# Altium PCB PMU.PcbDoc
Units mm, origin at the board's own origin, x right, y up, seen from the top; angles counter-clockwise.
Board outline 59.65 x 38.4 mm, 2 copper layers (Top Layer, Bottom Layer); 52 components, 40 nets, 142 pads, 4 vias.
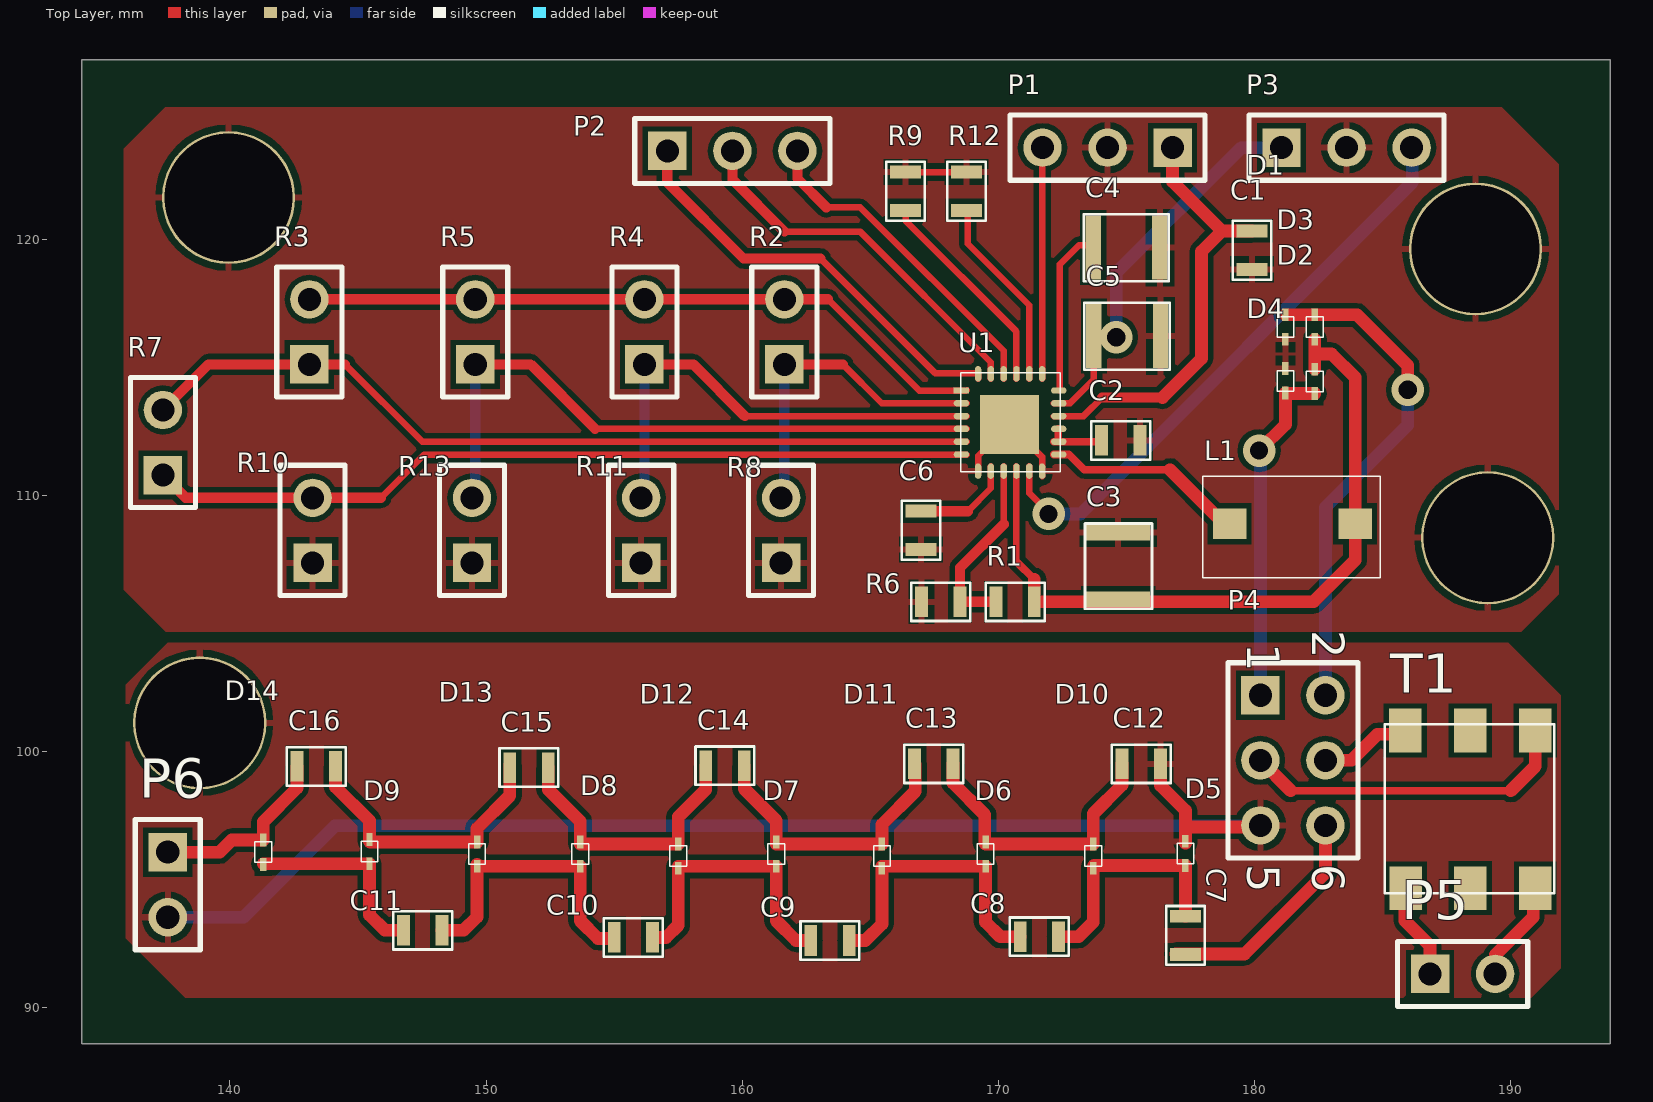
[diagram p0: Top Layer view]
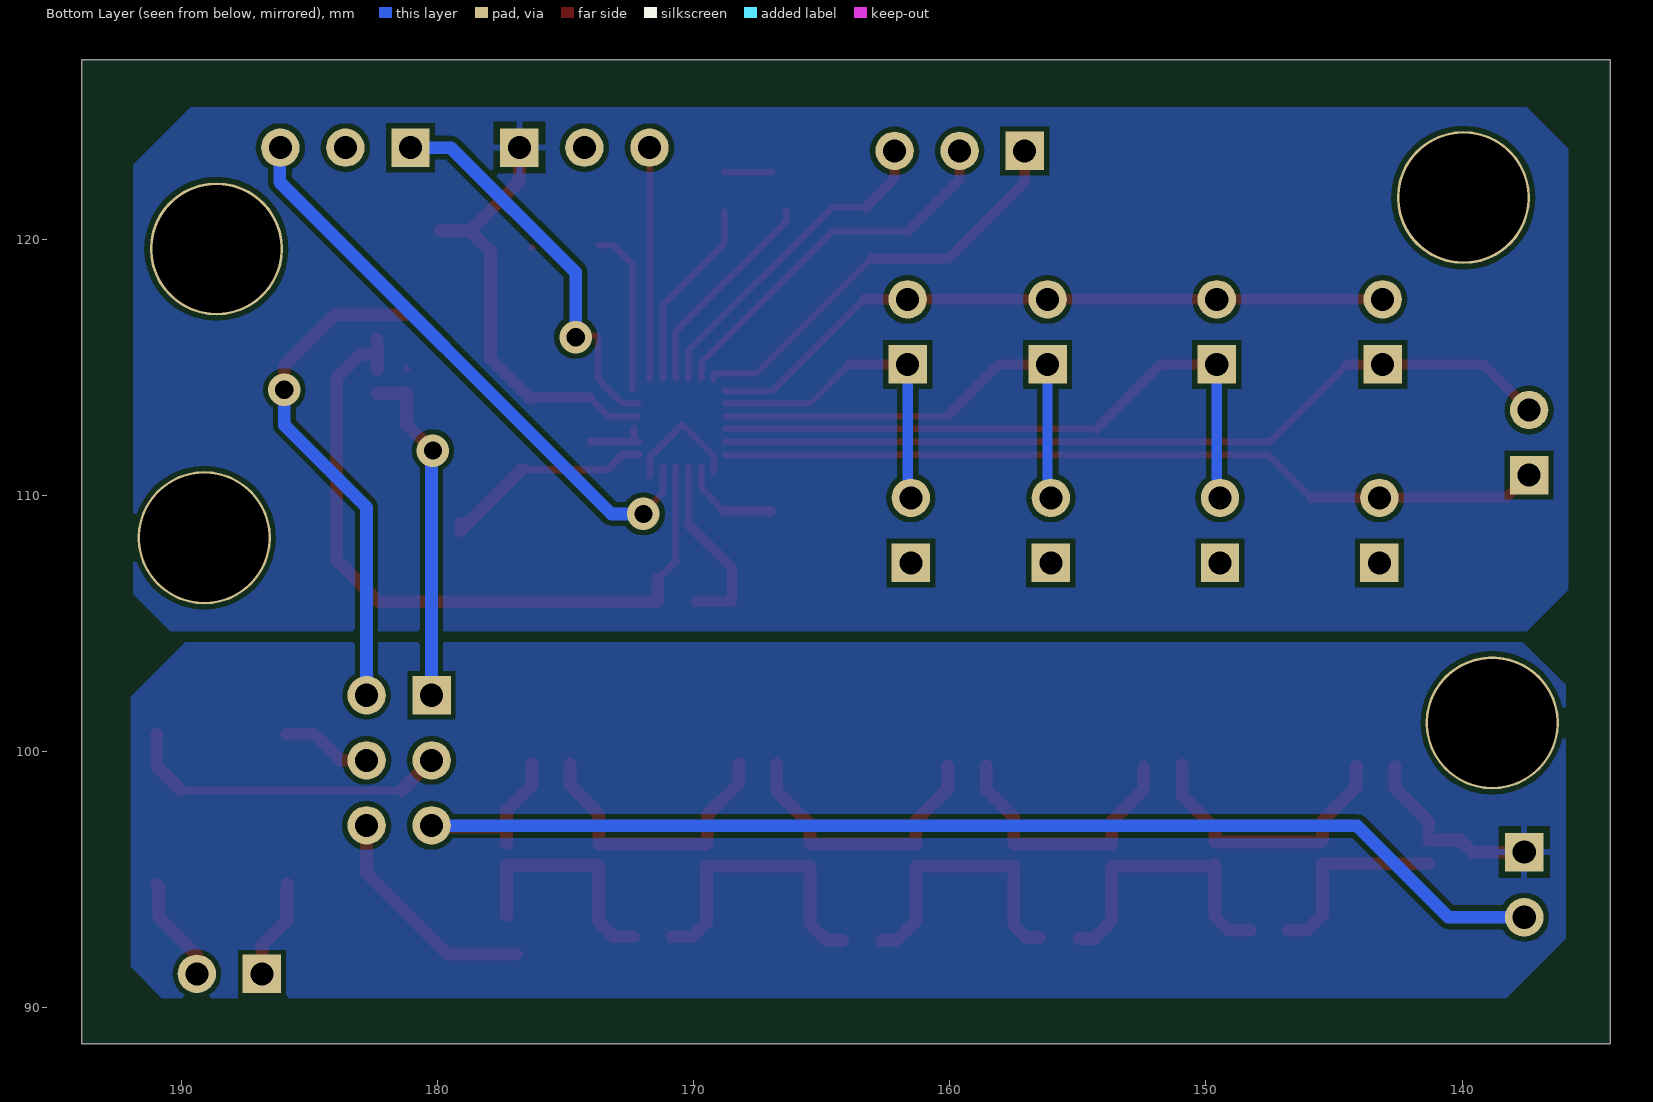
[diagram p1: Bottom Layer view, seen from below]

## Layer stack, top to bottom
Top Solder: solder mask 0.0102, Solder Resist, Dk 3.5
Top Layer: signal copper 0.0356
Dielectric 1: dielectric 0.32, FR-4, Dk 4.8
Bottom Layer: signal copper 0.0356
Bottom Solder: solder mask 0.0102, Solder Resist, Dk 3.5

## Board outline
134.225,88.6 193.875,88.6 193.875,127 134.225,127

## Design rules (kind name [scope] priority, off if disabled: settings)
Clearance 0 [All] p1: gap=0.2 except(0.127: Arc-Arc SMDPad-Text Arc-Track Arc-SMDPad Fill-Text Via-Via Track-SMDPad Track-Track Arc-THPad Via-Text Track-THPad SMDPad-SMDPad Poly-Text Track-Text Text-Text Arc-Text THPad-THPad Region-Text THPad-Text SMDPad-THPad)
PolygonConnect [All] p1: connectstyle=Relief reliefconductorwidth=0.254 reliefentries=4 polygonreliefangle="90 Angle" airgapwidth=0.254
RoutingVias [All] p1: holewidth=0.711 width=1.27 viastyle="Through Hole" minholewidth=0.711 minwidth=1.27 maxholewidth=0.711 maxwidth=1.27
SolderMaskExpansion [All] p1: expansion=0.102
UnpouredPolygon [All] p1: allowunpoured=FALSE
Width [All] p1: maxlimit=0.5 minlimit=0.254 preferedwidth=0.254
29 further rules are at their usual default settings.

## Components (designator, comment, footprint, x,y, rotation, side; value= is the part's Value field where it differs from the comment)
C1 "Cap" 0805 179.9,119.575 r90 top
C2 "Cap" 0805 174.775,112.15 r180 top
C3 "Cap" 1210 174.675,108.55 r270 top
C4 "Cap" 1210 176.3,119.675 r180 top
C5 "SuperCap" 1210 176.325,116.225 r180 top
C6 "Cap" 0805 166.977,108.637 r90 top
C7 "Cap" 0805 177.3,92.825 r270 top
C8 "Cap" 0805 171.6,92.775 r0 top
C9 "Cap" 0805 163.425,92.625 r0 top
C10 "Cap" 0805 155.75,92.75 r0 top
C11 "Cap" 0805 147.525,93.025 r0 top
C12 "Cap" 0805 175.575,99.525 r0 top
C13 "Cap" 0805 167.475,99.525 r0 top
C14 "Cap" 0805 159.325,99.45 r0 top
C15 "Cap" 0805 151.675,99.375 r0 top
C16 "Cap" 0805 143.375,99.425 r0 top
D1 "D Schottky" Diode2 181.2,116.175 r90 top
D2 "D Schottky" Diode2 182.35,116.975 r270 top
D3 "D Schottky" Diode2 182.35,114.05 r90 top
D4 "D Schottky" Diode2 181.2,114.875 r270 top
D5 "D Schottky" Diode2 177.3,96.425 r270 top
D6 "D Schottky" Diode2 169.5,96.4 r270 top
D7 "D Schottky" Diode2 161.325,96.4 r270 top
D8 "D Schottky" Diode2 153.675,96.4 r270 top
D9 "D Schottky" Diode2 145.45,96.5 r270 top
D10 "D Schottky" Diode2 173.7,95.525 r90 top
D11 "D Schottky" Diode2 165.45,95.525 r90 top
D12 "D Schottky" Diode2 157.5,95.525 r90 top
D13 "D Schottky" Diode2 149.65,95.6 r90 top
D14 "D Schottky" Diode2 141.3,95.675 r90 top
L1 "Inductor" Inductor_0 181.475,108.9 r180 top
P1 "Header 3" HDR1X3 176.8,123.575 r180 top
P2 "Header 3" HDR1X3 157.075,123.45 r0 top
P3 "Header 3" HDR1X3 181.05,123.575 r0 top
P4 "Header 3X2" HDR2X3 180.225,102.2 r270 top
P5 "Header 2" HDR1X2 186.85,91.325 r0 top
P6 "Header 2" HDR1X2 137.575,96.075 r270 top
R1 "Res1" 0805 170.65,105.85 r0 top
R2 "Res1" HDR1X2 161.643,115.114 r90 top
R3 "Res1" HDR1X2 143.101,115.114 r90 top
R4 "Res1" HDR1X2 156.182,115.114 r90 top
R5 "Res1" HDR1X2 149.578,115.114 r90 top
R6 "Res1" 0805 167.75,105.85 r0 top
R7 "Res1" HDR1X2 137.386,110.796 r90 top
R8 "Res1" HDR1X2 161.516,107.367 r90 top
R9 "Res1" 0805 166.375,121.875 r270 top
R10 "Res1" HDR1X2 143.228,107.367 r90 top
R11 "Res1" HDR1X2 156.055,107.367 r90 top
R12 "Res1" 0805 168.75,121.875 r270 top
R13 "Res1" HDR1X2 149.451,107.367 r90 top
T1 "Transformer" Transformer1 185.875,94.825 r90 top
U1 "ADP5092" LFCSP24 168.755,114.098 r0 top

## Footprints (in the part's own frame and the unit in brackets; to place one, negate y for a bottom-side part, rotate by r counter-clockwise, add the part's x,y. Pads: shape width x height; smd on the part's side, far side on the other; paste and mask are expansions set on the pad)
0805 [mm]
  rect 0.5x1.2 smd: 1(-0.75,0) 2(0.75,0)
  silkscreen extent -1.15,-0.75 1.15,0.75
1210 [mm]
  rect 0.6x2.5 smd: 1(0,0) 2(2.6,0)
  silkscreen extent -0.36,-1.3 2.97,1.32
Diode2 [mm]
  rect 0.5x0.25 smd mask+0.05: 1(-0.075,0) 2(0.875,0)
  silkscreen extent 0,-0.32 0.8,0.33
HDR1X2 [mm] "Connector; Header; 2 Position"
  rect 1.5x1.5 hole 0.9: 1(0,0)
  round 1.5 hole 0.9: 2(2.54,0)
  silkscreen extent -1.27,-1.27 3.81,1.27
HDR1X3 [mm] "Connector; Header; 3 Position"
  rect 1.5x1.5 hole 0.9: 1(0,0)
  round 1.5 hole 0.9: 2(2.54,0) 3(5.08,0)
  silkscreen extent -1.27,-1.27 6.35,1.27
HDR2X3 [mm] "Connector; Header; 3x2 Position"
  rect 1.5x1.5 hole 0.9: 1(0,0)
  round 1.5 hole 0.9: 2(0,2.54) 3(2.54,0) 4(2.54,2.54) 5(5.08,0) 6(5.08,2.54)
  silkscreen extent -1.27,-1.27 6.35,3.81
Inductor_0 [mm] "WE"
  rect 1.3x1.2 smd: 1(-2.45,0) 2(2.45,0)
  silkscreen extent -3.43,-1.85 3.5,2.12
LFCSP24 [mm]
  rect 0.6x0.25 smd mask+0.05: 1(-0.2,0)
  oval 0.6x0.25 smd mask+0.05: 2(-0.2,-0.5) 3(-0.2,-1) 4(-0.2,-1.5) 5(-0.2,-2) 6(-0.2,-2.5) 13(3.6,-2.5) 14(3.6,-2) 15(3.6,-1.5) 16(3.6,-1) 17(3.6,-0.5) 18(3.6,0)
  oval 0.25x0.6 smd mask+0.05: 7(0.45,-3.15) 8(0.95,-3.15) 9(1.45,-3.15) 10(1.95,-3.15) 11(2.45,-3.15) 12(2.95,-3.15) 19(2.95,0.65) 20(2.45,0.65) 21(1.95,0.65) 22(1.45,0.65) 23(0.95,0.65) 24(0.45,0.65)
  rect 2.3x2.3 smd mask+0.05: 25(1.675,-1.325)
  silkscreen extent -0.23,-3.17 3.66,0.69
Transformer1 [mm]
  rect 1.7x1.27 smd: 1(-0.15,-0.025) 2(-0.15,-2.54) 3(-0.15,-5.08) 4(6,-5.08) 5(6,-2.54) 6(6,0)
  silkscreen extent -0.35,-5.82 6.25,0.8

## Part data
C1 C2 C3 C4 C6 C7 C8 C9 C10 C11 C12 C13 C14 C15 C16: "Capacitor"
C5: library part Cap, "Super Capacitor"
D1 D2 D3 D4 D5 D6 D7 D8 D9 D10 D11 D12 D13 D14: "Schottky Diode"
P1 P2 P3: "Header, 3-Pin"
P4: "Header, 3-Pin, Dual row"
P5 P6: "Header, 2-Pin"
R1 R2 R3 R4 R5 R6 R7 R8 R9 R10 R11 R12 R13: "Resistor"

## Free pads (board coordinates)
  round 5.2 hole 5 mask+0: Shield1(139.95,121.625) Shield1(188.625,119.625) Shield1(189.1,108.35) Shield2(138.825,101.125)

## Via types
v1: diameter 1.27, hole 0.711, Top Layer to Bottom Layer, 4 vias

## Nets (pads, with @x,y where several pads share a name; then routed paths per layer and width w, separated by ;. In a path a pad name is that pad's centre, name@x,y a point inside that pad or via, vN(x,y) a via of type N, cw(c..) or ccw(c..) an arc to the next point about the centre after c; other vN are vias at no path point)
BACKUP: C4.2 U1.18 | length 6.5
  Top Layer w0.254: U1.18@172.4,114.098 172.4,119.025 173.15,119.775 C4.2@173.7,119.775
BAT: C5.2 P3.1 U1.17 | length 15.4
  Top Layer w0.254: U1.17@172.155,113.598 172.798,113.598 173.725,114.525 C5.2@173.725,116.075 ; C5.2 v1@174.6,116.225
  Bottom Layer w0.5: v1(174.6,116.175) 174.6,118.7 179.475,123.575 P3.1
GND: C1.1 C2.1 C3.1 C4.1 C5.1 C6.1 D1.1 D4.1 P1.2 P3.2 pad.Shield1 R6.1 R8.1 R9.1 R10.1 R11.1 R12.1 R13.1 U1.7 U1.12 U1.25 | length 7.4
  Top Layer w0.254: R9.1@166.9,122.625 R12.1@168.8,122.625 ; U1.7@169.209,110.9 169.209,111.552 U1.25 171.701,111.502 171.701,111.152 171.705,111.148 U1.12@171.705,110.745 ; P1.2 P1.2@174.325,123.575 ; C4.1 C4.1@176.325,119.65 ; P3.2@183.59,123.065 P3.2
GND2: C12.2 D5.1 P4.5 P6.2 pad.Shield2 | length 50.8
  Top Layer w0.5: C12.2 176.325,98.675 177.3,97.7 D5.1@177.3,96.425 ; 177.3,97.062 180.282,97.062 P4.5
  Bottom Layer w0.5: P6.2 140.535,93.535 144.105,97.105 P4.5@180.365,97.105
NetC2_2: C2.2 U1.14 U1.15 | length 2.4
  Top Layer w0.3: U1.14@172.155,112.098 C2.2@174.023,112.098 ; U1.14@172.33,112.098 U1.15@172.33,112.598
NetC6_2: C6.2 U1.8 | length 4
  Top Layer w0.254: 168.812,109.387 169.705,110.28 U1.8@169.705,111.148
  Top Layer w0.4: C6.2 168.812,109.387
NetC7_1: C7.1 C8.2 D5.2 D10.1 | length 9.4
  Top Layer w0.254: D10.1@173.7,95.525 D10.1@173.725,95.55 ; C7.1@177.275,93.55 C7.1
  Top Layer w0.5: C8.2 173.125,92.775 173.7,93.35 D10.1@173.7,95.525 ; D10.1@173.725,95.55 D5.2 C7.1
NetC8_1: C8.1 C9.2 D6.2 D11.1 | length 11.6
  Top Layer w0.5: C9.2 164.8,92.625 165.45,93.275 165.45,95.525 D6.2 169.5,93.35 170.075,92.775 C8.1
NetC9_1: C9.1 C10.2 D7.2 D12.1 | length 11.1
  Top Layer w0.5: C10.2 157.025,92.75 157.5,93.225 157.5,95.525 D7.2 161.325,93.4 162.1,92.625 C9.1
NetC10_1: C10.1 C11.2 D8.2 D13.1 | length 11.4
  Top Layer w0.254: C10.1@154.95,92.7 C10.1
  Top Layer w0.5: C11.2 149.125,93.025 149.65,93.55 D13.1@149.65,95.6 ; D13.1 D8.2 153.675,93.4 154.375,92.7 C10.1@154.95,92.7
NetC11_1: C11.1 D9.2 D14.1 | length 7.7
  Top Layer w0.5: D14.1@141.3,95.625 D9.2 145.45,93.625 146.05,93.025 C11.1
NetC12_1: C12.1 C13.2 D6.1 D10.2 | length 11.4
  Top Layer w0.254: D6.1@169.462,96.437 D6.1@169.5,96.4
  Top Layer w0.5: C13.2 168.225,98.775 169.462,97.538 D6.1@169.462,96.437 ; D6.1@169.5,96.4 D10.2 173.7,97.575 174.825,98.7 C12.1
NetC13_1: C13.1 C14.2 D7.1 D11.2 | length 11.4
  Top Layer w0.254: C13.1 C13.1@166.75,99.5
  Top Layer w0.5: C14.2 160.075,98.55 161.325,97.3 161.325,96.4 D11.2 165.45,97.15 166.75,98.45 C13.1@166.75,99.5
NetC14_1: C14.1 C15.2 D8.1 D12.2 | length 10.8
  Top Layer w0.5: C15.2 152.425,98.525 153.675,97.275 153.675,96.4 D12.2 157.5,97.45 158.575,98.525 C14.1
NetC15_1: C15.1 C16.2 D9.1 D13.2 | length 11.2
  Top Layer w0.254: D9.1@145.45,96.5 D9.1@145.475,96.475
  Top Layer w0.5: C16.2 144.125,98.625 145.45,97.3 D9.1@145.45,96.5 ; D9.1@145.475,96.475 D13.2 149.65,97 150.925,98.275 C15.1@150.925,99.475
NetL1_2: L1.2 U1.13 | length 8.4
  Top Layer w0.3: U1.13@172.155,111.598 172.157,111.6 172.75,111.6 173.35,111 176.7,111
  Top Layer w0.5: 176.7,111 179.075,108.625 L1.2@179.075,108.9
NetP2_1: P2.1 U1.24 | length 16.7
  Top Layer w0.254: 163.05,119.25 167.525,114.775 169.205,114.775 U1.24@169.205,114.548
  Top Layer w0.4: P2.1 157.075,122.225 160.05,119.25 163.05,119.25
NetP2_2: P2.2 U1.23 | length 14.8
  Top Layer w0.254: 161.65,120.3 164.6,120.3 169.705,115.195 U1.23@169.705,114.548
  Top Layer w0.4: P2.2 159.615,122.335 161.65,120.3
NetP2_3: P2.3 U1.22 | length 13
  Top Layer w0.254: 163.275,121.25 164.6,121.25 170.205,115.645 U1.22@170.205,114.548
  Top Layer w0.4: P2.3 162.155,122.37 163.275,121.25
NetP5_1: P5.1 T1.1 | length 3.9
  Top Layer w0.5: T1.1@185.875,94.825 185.875,93.4 186.85,92.425 P5.1
NetP5_2: P5.2 T1.3 | length 4.1
  Top Layer w0.5: P5.2 189.39,92.065 190.875,93.55 190.875,94.745 T1.3@190.955,94.825
NetR1_1: R1.1 R6.2 U1.9 | length 7.4
  Top Layer w0.254: 170.205,108.88 U1.9@170.205,111.148
  Top Layer w0.4: R1.1 R6.2 168.5,107.175 170.205,108.88
NetR2_1: R2.1 R8.2 U1.2 | length 12.8
  Top Layer w0.254: 163.929,115.114 165.445,113.598 U1.2@168.755,113.598
  Top Layer w0.4: R2.1 163.929,115.114
  Bottom Layer w0.4: R8.2@161.643,110.034 R2.1
NetR3_1: R3.1 R7.2 U1.5 | length 33.4
  Top Layer w0.254: 144.498,115.114 147.514,112.098 U1.5@168.755,112.098
  Top Layer w0.4: R7.2 139.164,115.114 R3.1 144.498,115.114
NetR4_1: R4.1 R11.2 U1.3 | length 18.5
  Top Layer w0.254: 160.103,113.098 U1.3@168.755,113.098
  Top Layer w0.4: R4.1 158.087,115.114 160.103,113.098
  Bottom Layer w0.4: R11.2@156.182,110.034 R4.1
NetR5_1: R5.1 R13.2 U1.4 | length 25.3
  Top Layer w0.254: 154.253,112.598 U1.4@168.755,112.598
  Top Layer w0.4: R5.1 151.737,115.114 154.253,112.598
  Bottom Layer w0.4: R13.2@149.578,110.034 R5.1
NetR7_1: R7.1 R10.2 U1.6 | length 32.4
  Top Layer w0.254: 145.895,109.907 147.586,111.598 U1.6@168.755,111.598
  Top Layer w0.4: R7.1 138.275,109.907 R10.2 145.895,109.907
NetR9_2: R9.2 U1.21 | length 8.4
  Top Layer w0.254: R9.2 166.375,120.725 170.705,116.395 U1.21@170.705,114.548
NetR12_2: R12.2 U1.20 | length 7.5
  Top Layer w0.254: R12.2@168.8,121.1 168.8,119.825 171.205,117.42 U1.20@171.205,114.548
R\S\T\\: P1.3 U1.19 | length 9
  Top Layer w0.254: U1.19@171.705,114.548 P1.3@171.705,123.575
REF: R2.2 R3.2 R4.2 R5.2 U1.1 | length 27.1
  Top Layer w0.254: 163.346,117.654 166.906,114.094 168.751,114.094 U1.1@168.755,114.098
  Top Layer w0.4: R3.2 R5.2 R4.2 R2.2 163.346,117.654
REG_GOOD: P3.3 U1.11 | length 23.1
  Top Layer w0.254: U1.11@171.205,111.148 171.205,110.095 171.958,109.342 v1(171.958,109.28)
  Bottom Layer w0.254: P3.3 P3.3@186.15,123.555
  Bottom Layer w0.5: v1(171.958,109.28) 173.205,109.28 186.15,122.225 P3.3@186.15,123.555
VCC: C1.2 P1.1 U1.16 | length 17.2
  Top Layer w0.254: U1.16@172.155,113.098 173.323,113.098 174.05,113.825
  Top Layer w0.4: 174.05,113.825 176.4,113.825
  Top Layer w0.5: 176.4,113.825 177.925,115.35 177.925,119.525 178.725,120.325 ; P1.1 176.8,122.25 178.725,120.325 ; C1.2 178.725,120.325
VCC2: C16.1 D14.2 P6.1 | length 7.3
  Top Layer w0.5: P6.1 139.6,96.075 140.075,96.55 D14.2 141.3,97.25 142.625,98.575 C16.1
VIN: C3.2 D2.2 D3.2 L1.1 R1.2 U1.10 | length 29
  Top Layer w0.254: 170.705,107.42 U1.10@170.705,111.148
  Top Layer w0.3: 170.705,107.42 171.4,106.725
  Top Layer w0.5: 171.4,106.725 R1.2 182.3,105.85 183.925,107.475 L1.1 183.925,114.6 183,115.525 182.35,115.525 ; D3.2 D2.2
VIN1+: D1.2 D2.1 P4.2 | length 19.8
  Top Layer w0.5: D1.2 D2.1 184,117.05 185.975,115.075 v1(185.975,114.125)
  Bottom Layer w0.5: P4.2 182.765,109.54 185.975,112.75 v1(185.975,114.125)
VIN1-: D3.1 D4.2 P4.1 | length 13.4
  Top Layer w0.5: v1(180.175,111.75) 181.2,112.775 D4.2 181.225,113.975 D3.1
  Bottom Layer w0.5: v1(180.175,111.75) 180.225,111.7 P4.1
VIN2+: C7.2 P4.6 | length 9
  Top Layer w0.5: C7.2@176.925,92.1 179.6,92.1 182.765,95.265 P4.6
VIN+: P4.4 T1.6 | length 3.5
  Top Layer w0.5: P4.4 183.785,99.66 184.8,100.675 T1.6@185.875,100.675
VIN-: P4.3 T1.4 | length 12.9
  Top Layer w0.3: 181.41,98.475 190,98.475
  Top Layer w0.5: P4.3 181.41,98.475 ; 190,98.475 190.955,99.43 T1.4@190.955,100.675
pads on no net: T1.2 T1.5

## Polygon pours and split planes (outlines as drawn)
VCC on Bottom Layer "Bottom Layer" (solid, pour order 5): 191.875,122.9 189.628,125.147 137.472,125.147 135.862,123.537 135.862,106.313 137.475,104.7 190.425,104.7 191.875,106.15
VCC2 on Bottom Layer "Bottom Pour 2" (solid, pour order 8): 135.962,102.612 137.625,104.275 189.85,104.275 191.975,102.15 191.975,91.6 190.75,90.375 138.275,90.375 135.962,92.688
GND on Top Layer "Top Pour" (solid, pour order 7): 135.862,123.537 137.472,125.147 189.653,125.147 191.875,122.925 191.875,106.15 190.4,104.675 137.5,104.675 135.862,106.313
GND2 on Top Layer "Top Pour 2" (solid, pour order 6): 135.937,102.612 137.575,104.25 189.9,104.25 191.95,102.2 191.95,91.55 190.8,90.4 138.25,90.4 135.937,92.713

## Silkscreen, mask and mechanical layers (free items; w line width, h text height)
Mechanical 1:
  lines w0.4: 135.45,91.975 135.45,124.15 136.875,125.575 190.1,125.575 192.625,123.05 192.625,91.25 191.2,89.825 137.6,89.825 135.45,91.975

## Dimensions
134.55,125.625 to 135.45,89.825 on Top Overlay
135.45,89.825 to 192.75,89.675 on Top Overlay

## Text inside footprints (layer, text, board x,y; h text height)
P4: Top Overlay "1" at 179.717,104.232 h1.27 r270; Top Overlay "2" at 182.257,104.74 h1.27 r270; Top Overlay "5" at 179.717,95.596 h1.27 r270; Top Overlay "6" at 182.257,95.596 h1.27 r270